# Altium PCB StuderA80ReproExtend_V0.1.PcbDoc
Units mil, origin at the board's own origin, x right, y up, seen from the top; angles counter-clockwise.
Board outline 8780 x 3208.66 mil, 4 copper layers (Top Signal, Signal Layer 1, Signal Layer 2, Bottom Signal), stack 30.634 mil thick; 19 components, 17 nets, 38 pads, 0 vias.
Unrouted connection lines stored in the file: 2.
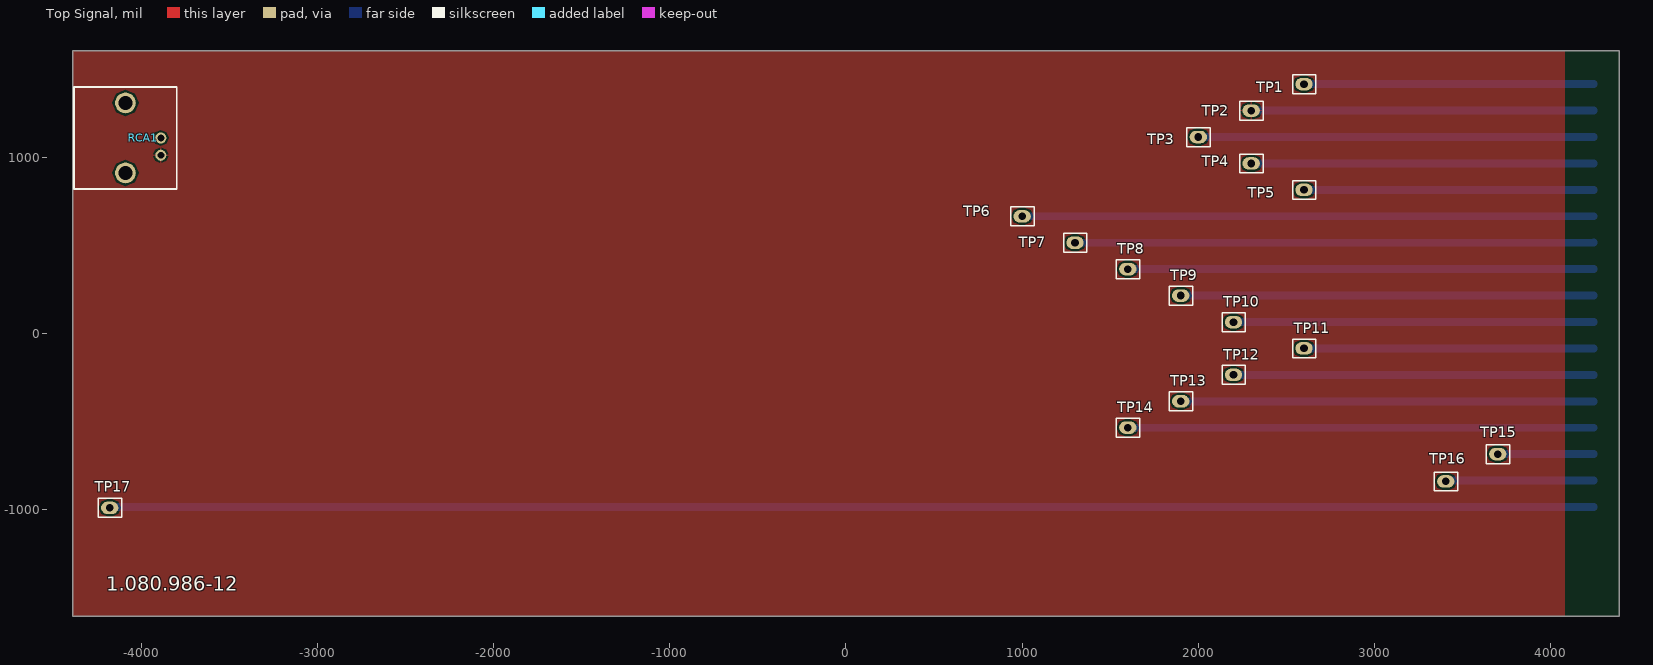
[diagram p0: Top Signal view]
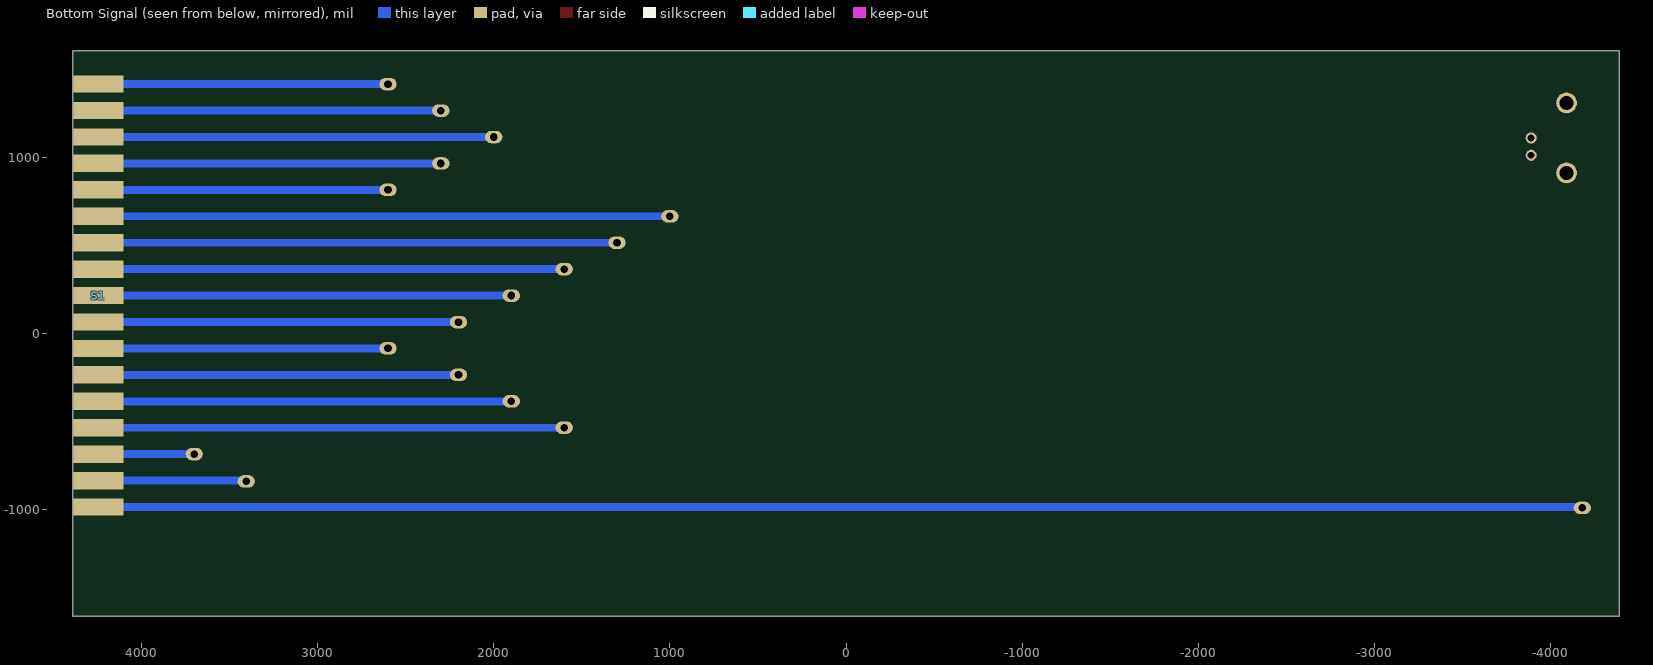
[diagram p1: Bottom Signal view, seen from below]
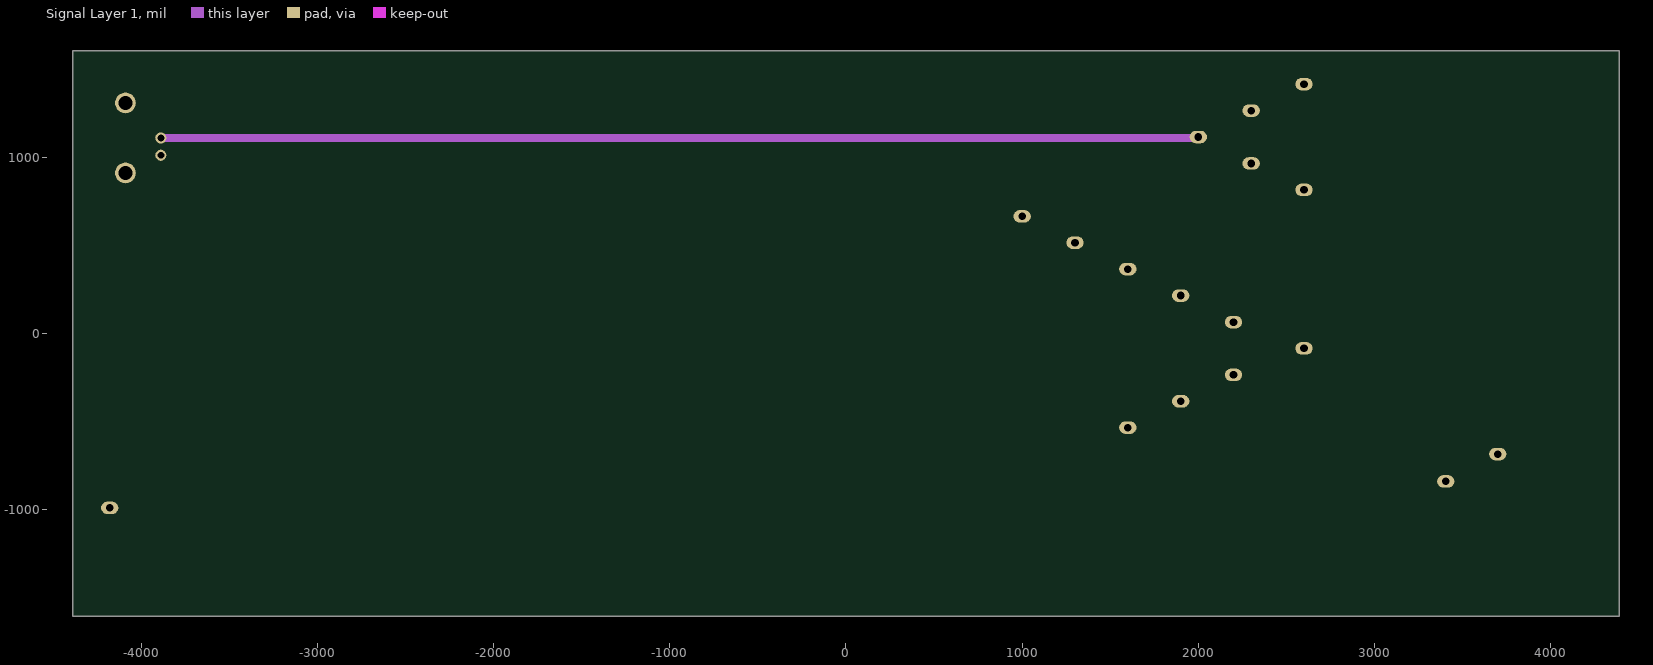
[diagram p2: Signal Layer 1]
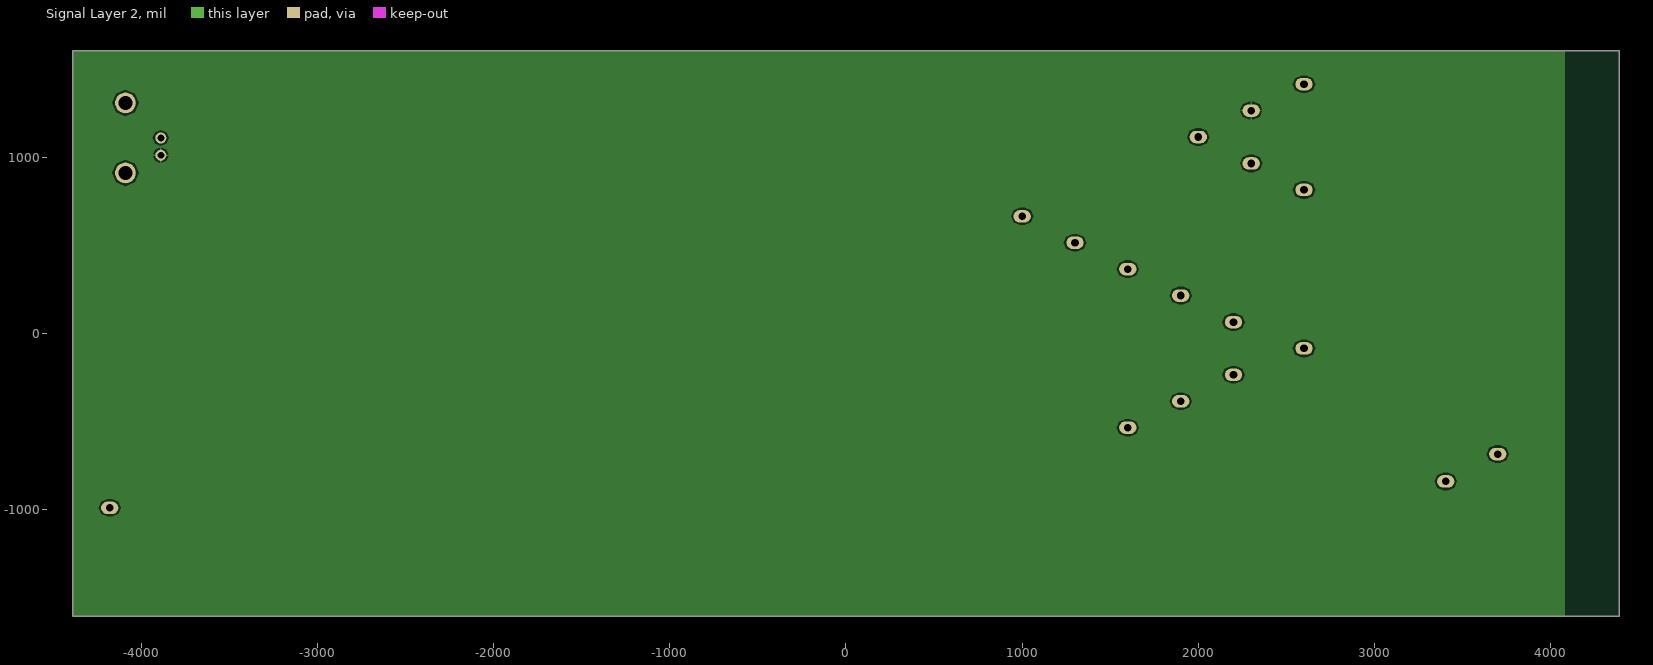
[diagram p3: Signal Layer 2]

## Layer stack, top to bottom
Top Solder: solder mask 0.4, Solder Resist, Dk 3.5
Top Signal: signal copper 1.4
Dielectric 1: core 10, FR-4, Dk 4.2
Signal Layer 1: signal copper 1.417
Dielectric 3: prepreg 5, Dk 4.2
Signal Layer 2: signal copper 1.417
Dielectric 2: core 10, Dk 4.2
Bottom Signal: signal copper 1.4
Bottom Solder: solder mask 0.4, Solder Resist, Dk 3.5

## Board outline
-4390,-1604.33 -4390,1604.33 4390,1604.33 4390,-1604.33

## Design rules (kind name [scope] priority, off if disabled: settings)
Clearance [All] p1: gap=10 ignorepadtopadclearanceinfootprint=FALSE except(0: Arc-Hole Track-Hole SMDPad-Hole THPad-Hole Via-Hole Fill-Hole Poly-Hole Region-Hole Text-Hole)
PolygonConnect [All] p1: connectstyle=Relief reliefconductorwidth=10 reliefentries=4 polygonreliefangle="90 Angle" airgapwidth=10
RoomDefinition StuderA80ReproExtend_V0.1 [InComponentClass('StuderA80ReproExtend_V0.1')] p1: confinementstyle=ConfineIn formatcopy=TRUE lockcomponents=FALSE outline -6440,-3370 -4440,-3370 -4440,-2370 -6440,-2370
RoutingVias [All] p1: holewidth=28 width=50 viastyle="Through Hole" minholewidth=28 minwidth=50 maxholewidth=28 maxwidth=50
SolderMaskExpansion [All] p1: expansion=4
Width [All] p1: maxlimit=300 minlimit=10 preferedwidth=45
30 further rules are at their usual default settings.

## Components (designator, comment, footprint, x,y, rotation, side; value= is the part's Value field where it differs from the comment)
RCA1 "RCA" RCA-RJ255 -4090.79,1110 r0 top
S1 "ReproInterface-1.080.986-12" REPROINTERFACE 4245,215 r0 top
TP1 "TestPoint" TP-1.0MM 2600,1415 r90 top
TP2 "TestPoint" TP-1.0MM 2300,1265 r90 top
TP3 "TestPoint" TP-1.0MM 2000,1115 r90 top
TP4 "TestPoint" TP-1.0MM 2300,965 r90 top
TP5 "TestPoint" TP-1.0MM 2600,815 r90 top
TP6 "TestPoint" TP-1.0MM 1000,665 r90 top
TP7 "TestPoint" TP-1.0MM 1300,515 r90 top
TP8 "TestPoint" TP-1.0MM 1600,365 r90 top
TP9 "TestPoint" TP-1.0MM 1900,215 r90 top
TP10 "TestPoint" TP-1.0MM 2200,64 r90 top
TP11 "TestPoint" TP-1.0MM 2600,-85 r90 top
TP12 "TestPoint" TP-1.0MM 2200,-235 r90 top
TP13 "TestPoint" TP-1.0MM 1900,-385 r90 top
TP14 "TestPoint" TP-1.0MM 1600,-535 r90 top
TP15 "TestPoint" TP-1.0MM 3700,-685 r90 top
TP16 "TestPoint" TP-1.0MM 3405,-840 r90 top
TP17 "TestPoint" TP-1.0MM -4180,-990 r90 top

## Footprints (in the part's own frame and the unit in brackets; to place one, negate y for a bottom-side part, rotate by r counter-clockwise, add the part's x,y. Pads: shape width x height; smd on the part's side, far side on the other; paste and mask are expansions set on the pad)
RCA-RJ255 [mm] "RCA Socket"
  round 1.6 hole 1: 1(5.1,0) 2(5.1,-2.5)
  round 3 hole 2.02: 2(0,-5.05) 2(0,5.05)
  silkscreen extent -7.4,-7.35 7.4,7.35
REPROINTERFACE [mm] "Studer A80 RC Reproduce Card 1.080.986-12 Interface"
  rect 7.35x2.5 smd far side: 1(0,30.5) 2(0,26.688) 3(0,22.875) 4(0,19.062) 5(0,15.25) 6(0,11.438) 7(0,7.625) 8(0,3.812) 9(0,0) 10(0,-3.812) 11(0,-7.625) 12(0,-11.438) 13(0,-15.25) 14(0,-19.062) 15(0,-22.875) 16(0,-26.688) 17(0,-30.5)
TP-1.0MM [mm] "Test Point with 1.0mm hole"
  oval 1.8x2.5 hole 1.1: 1(0,0)
  silkscreen extent -1.37,-1.73 1.35,1.65

## Part data
RCA1: "RCA Connector", Publisher="Altium Limited", Revision="17-Jul-2002: Re-released for DXP Platform."
S1: "Studer A80 RC Reproduce Card 1.080.986-12 Interface"

## Nets (pads, with @x,y where several pads share a name; then routed paths per layer and width w, separated by ;. In a path a pad name is that pad's centre, name@x,y a point inside that pad or via, vN(x,y) a via of type N, cw(c..) or ccw(c..) an arc to the next point about the centre after c; other vN are vias at no path point)
NetRCA1_1: RCA1.1 S1.3 TP3.1 | length 8137.3
  Signal Layer 1 w45: RCA1.1 1995,1110 TP3.1
  Bottom Signal w45: TP3.1 4244.41,1115 S1.3
NetRCA1_2: RCA1.2 S1.2 TP2.1 | length 1945.3
  Bottom Signal w45: TP2.1 4244.31,1265 S1.2
NetS1_1: S1.1 TP1.1 | length 1645.3
  Bottom Signal w45: TP1.1 4244.21,1415 S1.1
NetS1_4: S1.4 TP4.1 | length 1945.2
  Bottom Signal w45: TP4.1 4244.51,965 S1.4
NetS1_5: S1.5 TP5.1 | length 1645.2
  Bottom Signal w45: TP5.1 2600.39,815.39 S1.5
NetS1_6: S1.6 TP6.1 | length 3245.1
  Bottom Signal w45: TP6.1 1000.3,665.3 S1.6
NetS1_7: S1.7 TP7.1 | length 2945.1
  Bottom Signal w45: TP7.1 4244.8,515 S1.7
NetS1_8: S1.8 TP8.1 | length 2645
  Bottom Signal w45: TP8.1 1600.1,365.1 S1.8
NetS1_9: S1.9 TP9.1 | length 2345
  Bottom Signal w45: TP9.1 S1.9
NetS1_10: S1.10 TP10.1 | length 2045.4
  Bottom Signal w45: TP10.1 4244.08,64 S1.10
NetS1_11: S1.11 TP11.1 | length 1645.1
  Bottom Signal w45: TP11.1 2600.2,-85.2 S1.11
NetS1_12: S1.12 TP12.1 | length 2045.1
  Bottom Signal w45: TP12.1 4244.68,-235 S1.12
NetS1_13: S1.13 TP13.1 | length 2345.2
  Bottom Signal w45: TP13.1 1900.39,-385.39 S1.13
NetS1_14: S1.14 TP14.1 | length 2645.2
  Bottom Signal w45: TP14.1 1600.47,-535.47 S1.14
NetS1_15: S1.15 TP15.1 | length 545.2
  Bottom Signal w45: TP15.1 3700.59,-685.59 S1.15
NetS1_16: S1.16 TP16.1 | length 841.8
  Bottom Signal w45: TP16.1 3409.29,-835.71 S1.16
NetS1_17: S1.17 TP17.1 | length 8426.7
  Bottom Signal w45: TP17.1 -4175.79,-985.79 S1.17

## Polygon pours and split planes (outlines as drawn)
NetRCA1_2 on Top Signal "Top Layer-No Net" (solid, pour order 2): -4390,1605 4080,1605 4080,-1605 -4390,-1605
NetRCA1_2 on Signal Layer 2 "Top Layer-No Net" (solid, pour order 4): -4390,1605 4080,1605 4080,-1605 -4390,-1605

## Silkscreen, mask and mechanical layers (free items; w line width, h text height)
Top Overlay:
  text "1.080.986-12" at -4200,-1460 h80
Mechanical 1:
  the board outline again, w10
Drill Drawing:
  the board outline again, w10